# Altium PCB Ciruit_Analyzer.PcbDoc
Units mm, origin at the board's own origin, x right, y up, seen from the top; angles counter-clockwise.
Board outline 50.93 x 49.66 mm, 2 copper layers (Top Layer, Bottom Layer); 10 components, 6 nets, 28 pads, 0 vias.
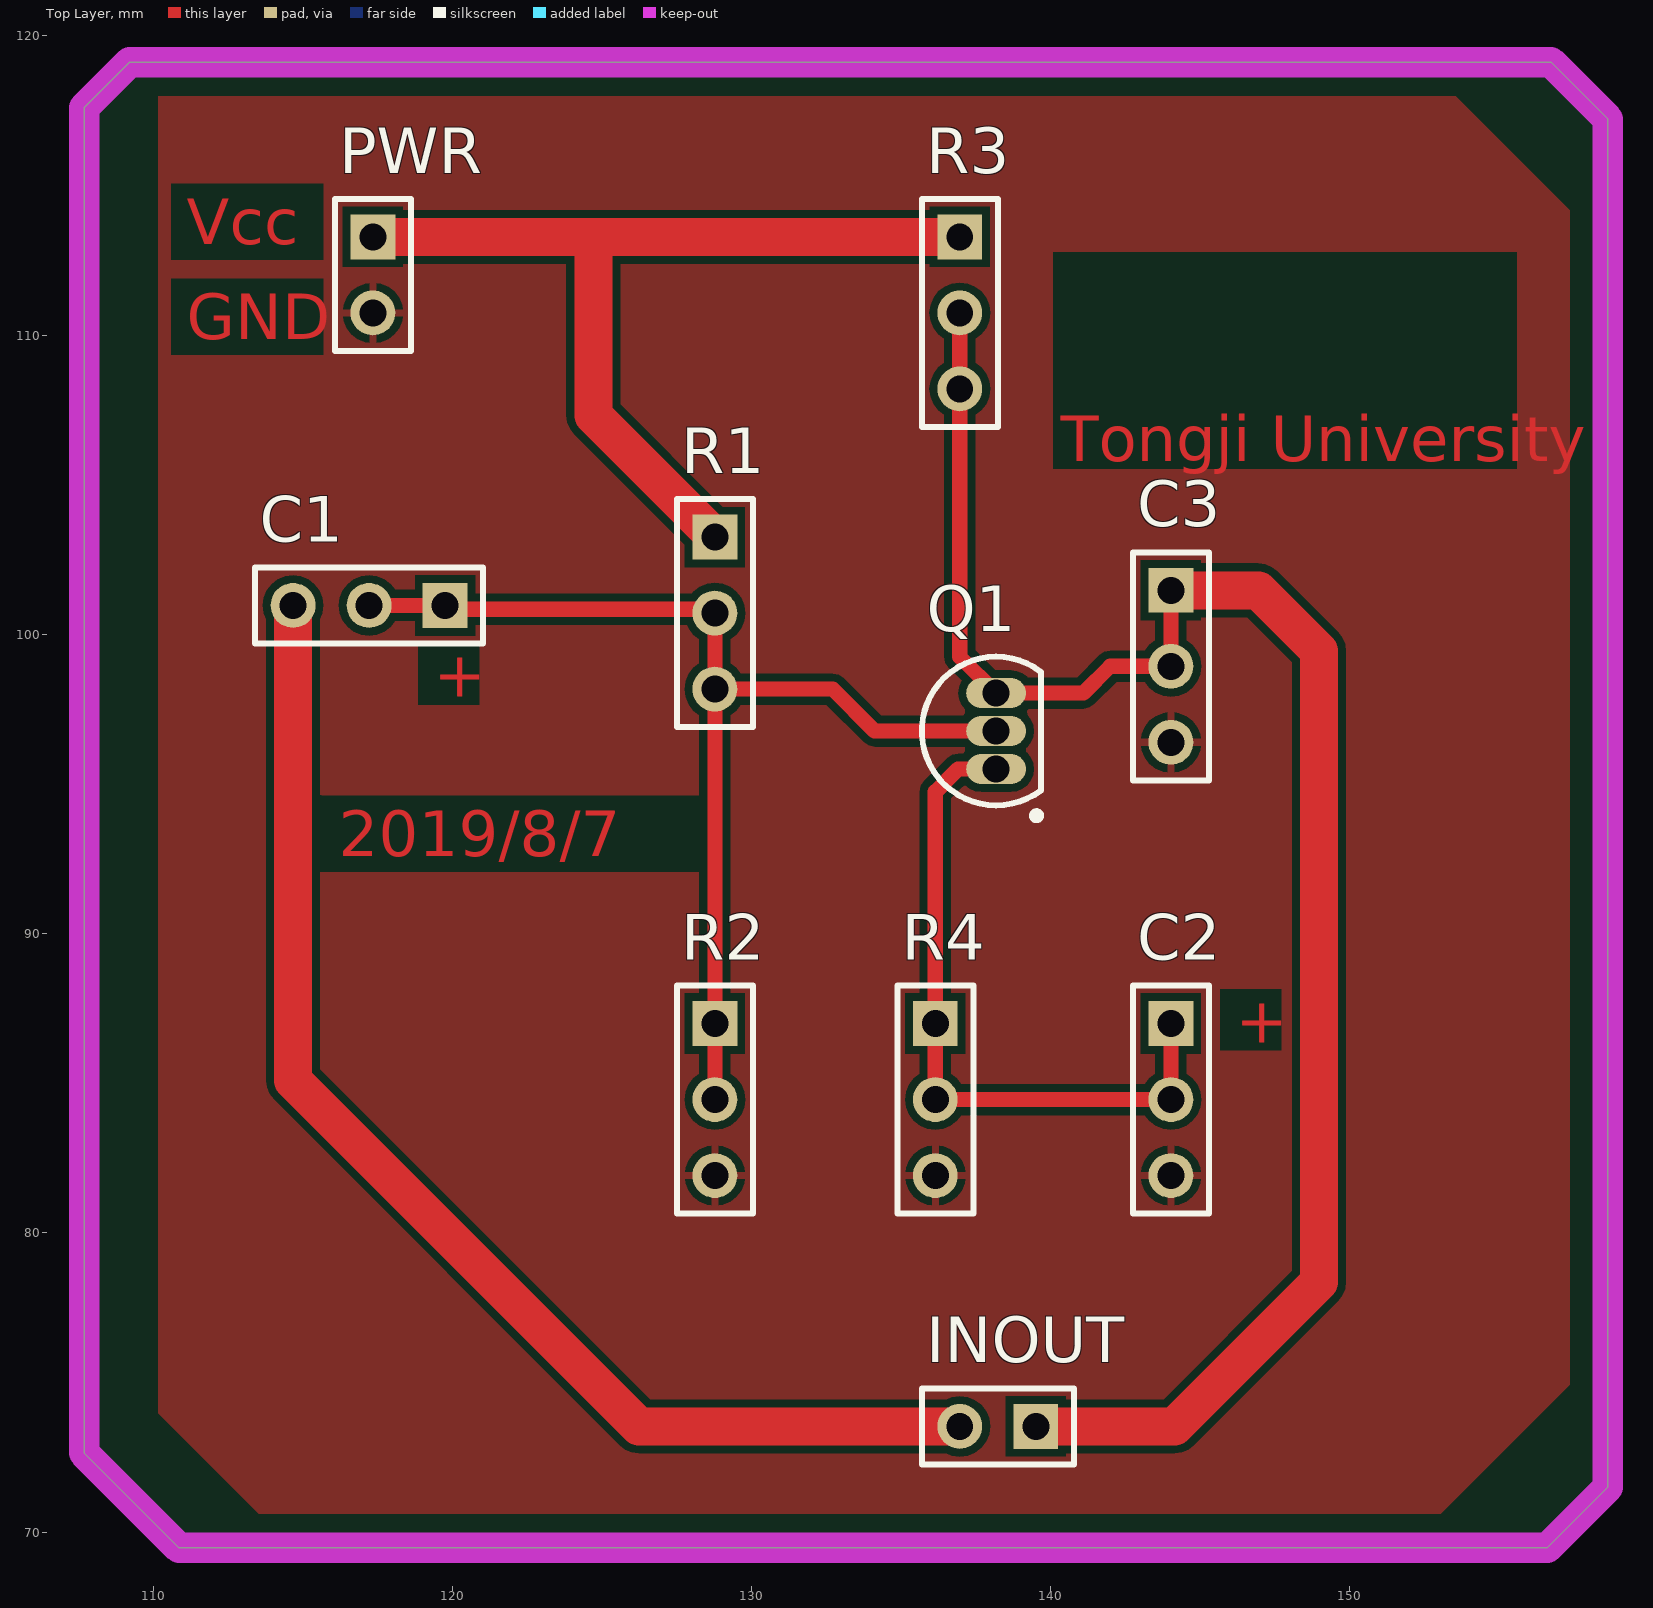
[diagram p0: Top Layer view]
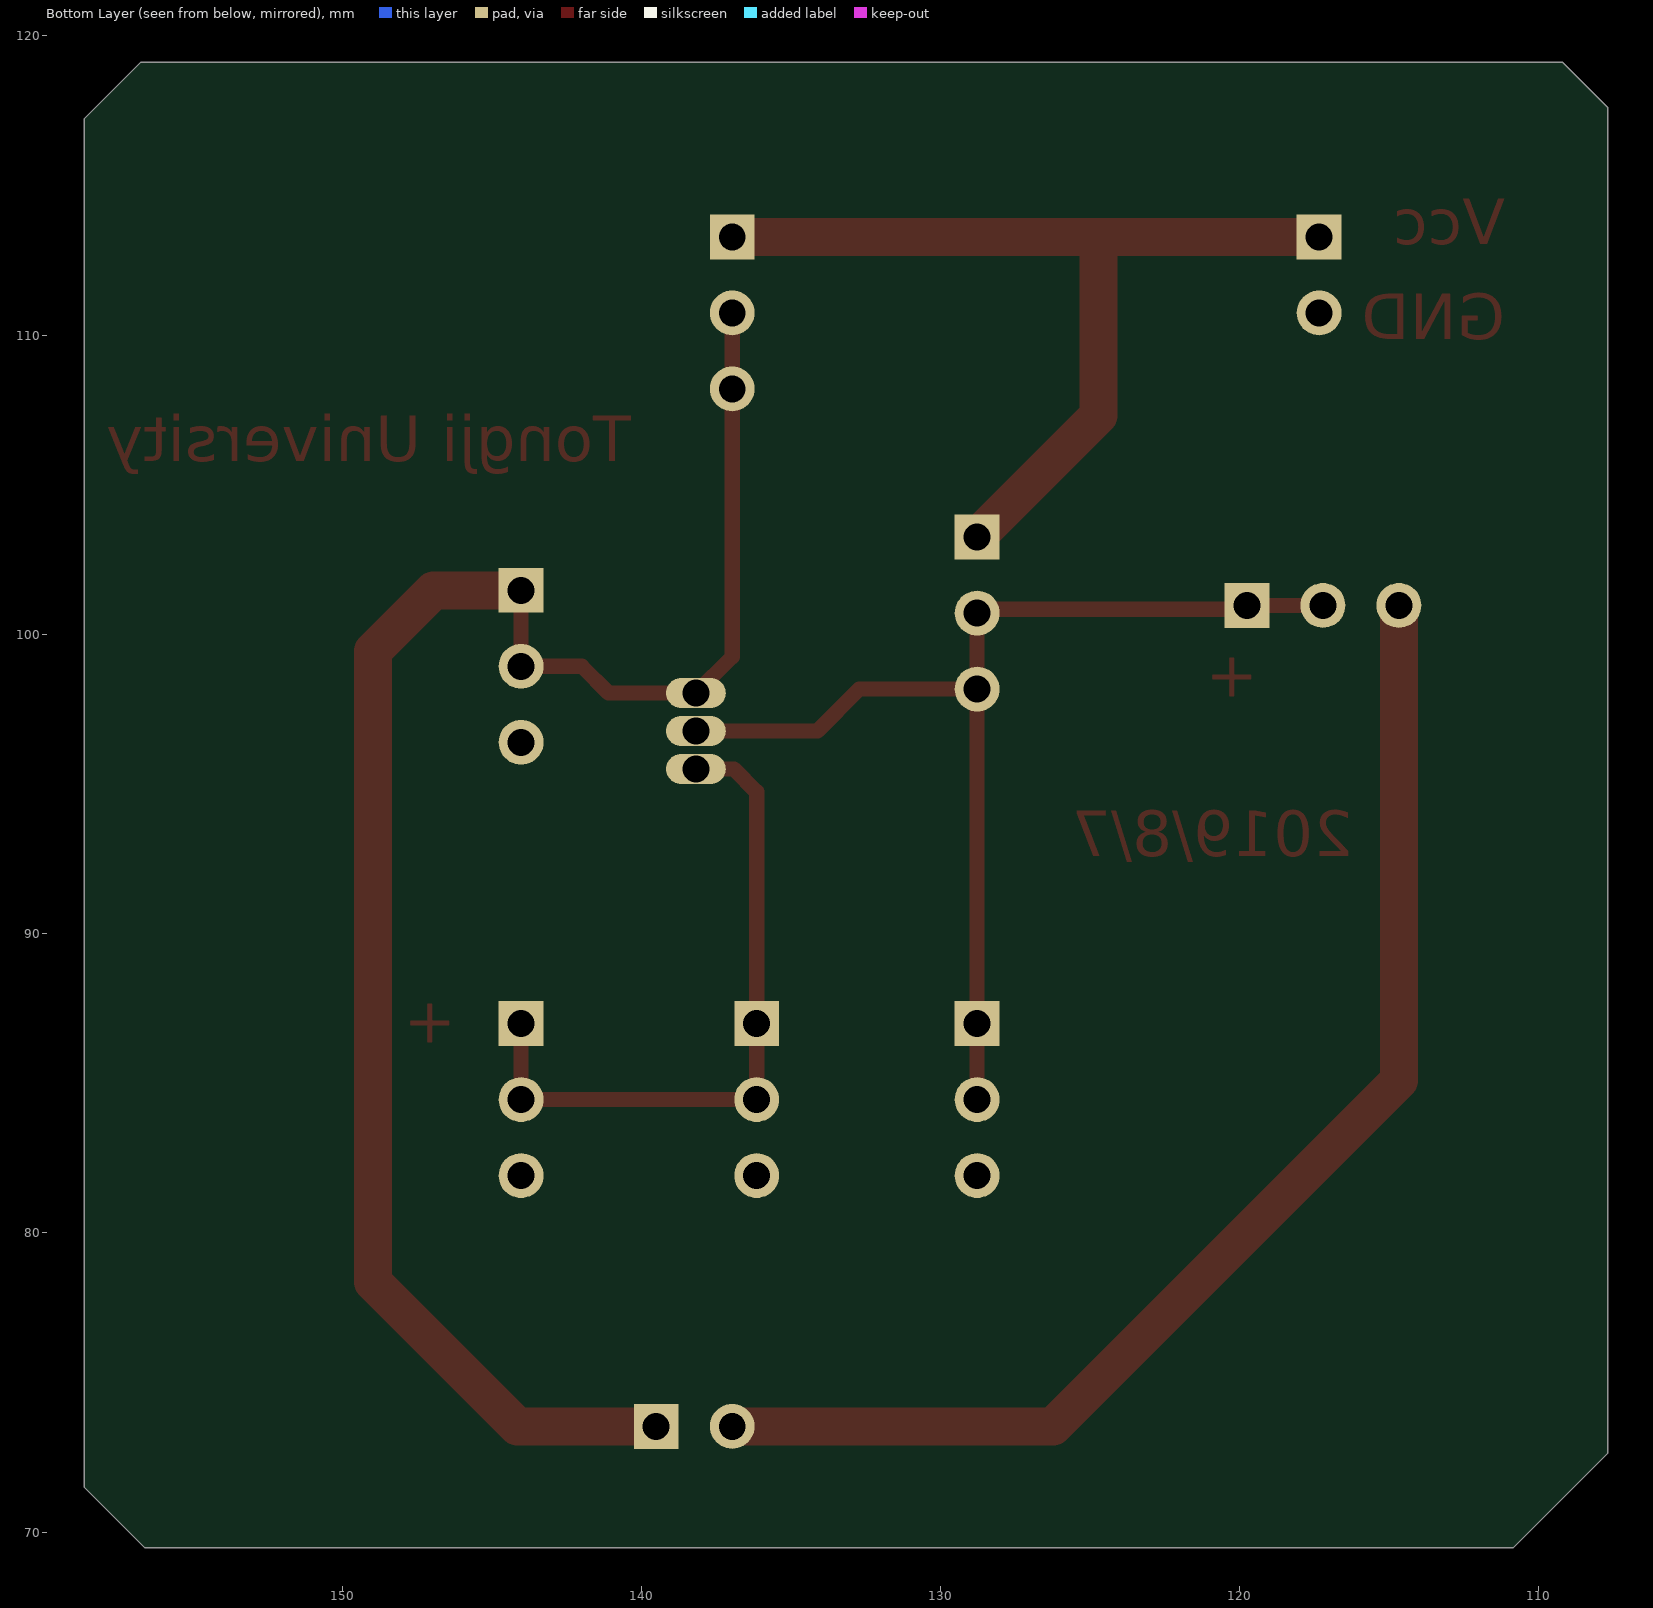
[diagram p1: Bottom Layer view, seen from below]

## Layer stack, top to bottom
Top Solder: solder mask 0.0102, Solder Resist, Dk 3.5
Top Layer: signal copper 0.0356
Dielectric 1: dielectric 0.32, FR-4, Dk 4.8
Bottom Layer: signal copper 0.0356
Bottom Solder: solder mask 0.0102, Solder Resist, Dk 3.5

## Board outline
107.696,72.644 107.696,117.602 109.22,119.126 156.718,119.126 158.623,117.221 158.623,71.501 156.591,69.469 110.871,69.469

## Design rules (kind name [scope] priority, off if disabled: settings)
Clearance [All] p1: gap=0.254 ignorepadtopadclearanceinfootprint=FALSE except(0: Arc-Hole Track-Hole SMDPad-Hole THPad-Hole Via-Hole Fill-Hole Poly-Hole Region-Hole Text-Hole)
PolygonConnect [All] p1: connectstyle=Relief reliefconductorwidth=0.254 reliefentries=4 polygonreliefangle="90 Angle" airgapwidth=0.254
RoutingVias [All] p1: holewidth=0.711 width=1.27 viastyle="Through Hole" minholewidth=0.711 minwidth=1.27 maxholewidth=0.711 maxwidth=1.27
SolderMaskExpansion [All] p1: expansion=0.102
Width [All] p1: maxlimit=1.27 minlimit=0.254 preferedwidth=0.508 minimp=50.000000 maximp=50.000000 favimp=50.000000
30 further rules are at their usual default settings.

## Components (designator, comment, footprint, x,y, rotation, side; value= is the part's Value field where it differs from the comment)
C1 "10u" HDR1X3 119.761,100.965 r180 top
C2 "47uf" HDR1X3 144.018,86.995 r270 top
C3 "470pf" HDR1X3 144.018,101.473 r270 top
INOUT "" HDR1X2 139.502,73.533 r180 top
PWR "" HDR1X2 117.348,113.284 r270 top
Q1 "9013" TO-92A 138.176,96.769 r0 top
R1 "R1 43K" HDR1X3 128.778,103.251 r270 top
R2 "R2 15K" HDR1X3 128.778,86.995 r270 top
R3 "R3 2K" HDR1X3 136.962,113.284 r270 top
R4 "R4 1K" HDR1X3 136.144,86.995 r270 top

## Footprints (in the part's own frame and the unit in brackets; to place one, negate y for a bottom-side part, rotate by r counter-clockwise, add the part's x,y. Pads: shape width x height; smd on the part's side, far side on the other; paste and mask are expansions set on the pad)
HDR1X2 [mm] "Connector; Header; 2 Position"
  rect 1.5x1.5 hole 0.9: 1(0,0)
  round 1.5 hole 0.9: 2(2.54,0)
  silkscreen extent -1.27,-1.27 3.81,1.27
HDR1X3 [mm] "Connector; Header; 3 Position"
  rect 1.5x1.5 hole 0.9: 1(0,0)
  round 1.5 hole 0.9: 2(2.54,0) 3(5.08,0)
  silkscreen extent -1.27,-1.27 6.35,1.27
TO-92A [mm] "TO, Flat Index; 3 In-Line, Axial Leads; Body Dia. 4.5mm; Leads 0.51 x 0.48 mm (max)"
  oval 2x1 hole 0.9: 1(0,-1.27) 2(0,0) 3(0,1.27)
  silkscreen extent -2.48,-2.95 1.5,2.48, body extent -2.48,-2.5 1.5,2.5, height 6.86

## Part data
C1 C2 C3 R1 R2 R3 R4: library part "Header 3", "Header, 3-Pin", LatestRevisionDate=17-Jul-2002, LatestRevisionNote="Re-released for DXP Platform.", Publisher="Altium Limited"
INOUT PWR: library part "Header 2", "Header, 2-Pin", LatestRevisionDate=17-Jul-2002, LatestRevisionNote="Re-released for DXP Platform.", Publisher="Altium Limited"
Q1: library part 2N3904, "NPN General Purpose Amplifier", ComponentLink1Description="Manufacturer Link", ComponentLink1URL=http://www.fairchildsemi.com/, ComponentLink2Description=Datasheet, ComponentLink2URL=http://www.fairchildsemi.com/ds/2N%2F2N3904.pdf, DatasheetVersion=1997, LatestRevisionDate=15-Jan-2003, LatestRevisionNote="PCB Footprint 'BCY-W3/D4.7' replaced", PackageDescription="TO, Flat Index; 3 In-Line, Axial Leads; Body Dia. 4.5mm; Leads 0.51 x 0.48 mm (max)", PackageReference=TO-92A, PackageVersion=Sep-1998, Published=8-Jun-2000, Publisher="Altium Limited"

## Nets (pads, with @x,y where several pads share a name; then routed paths per layer and width w, separated by ;. In a path a pad name is that pad's centre, name@x,y a point inside that pad or via, vN(x,y) a via of type N, cw(c..) or ccw(c..) an arc to the next point about the centre after c; other vN are vias at no path point)
DC+12V: PWR.1 R1.1 R3.1 | length 31.3
  Top Layer w1.27: PWR.1 124.714,113.284 ; R1.1 124.714,107.315 124.714,113.284 ; R3.1 124.714,113.284
GND: C2.3 C3.3 PWR.2 R2.3 R4.3
NetC1_1: C1.1 C1.2 Q1.2 R1.2 R1.3 R2.1 R2.2 | length 37.9
  Top Layer w0.508: C1.2 C1.1 119.888,100.838 128.651,100.838 R1.2 R1.3 ; R2.2 R2.1 R1.3 ; Q1.2 134.117,96.769 132.715,98.171 R1.3
NetC2_1: C2.1 C2.2 Q1.1 R4.1 R4.2 | length 23
  Top Layer w0.508: Q1.1 136.906,95.499 136.144,94.737 R4.1 R4.2 C2.2 C2.1
Ui: C1.3 INOUT.2 | length 42.9
  Top Layer w1.27: C1.3 114.681,85.09 126.238,73.533 INOUT.2
Uo: C3.1 C3.2 INOUT.1 Q1.3 R3.2 R3.3 | length 60.3
  Top Layer w0.508: R3.2 R3.3 136.962,99.253 Q1.3 141.097,98.039 141.991,98.933 C3.2 C3.1
  Top Layer w1.27: INOUT.1 144.145,73.533 148.971,78.359 148.971,99.441 146.939,101.473 C3.1

## Polygon pours and split planes (outlines as drawn)
GND on Top Layer "GND_L01_P002" (solid, remove dead copper, pour order 2): 110.172,117.983 153.543,117.983 157.353,114.173 157.353,74.93 153.035,70.612 113.538,70.612 110.172,73.977

## Keep-outs
Top Layer:
  the board outline again, w1.016

## Other copper
Top Layer:
  text "Vcc" at 111.125,113.03 h1.52
  text "GND" at 111.125,109.855 h1.52
  text "Tongji University" at 140.335,105.791 h1.52
  text "+" at 119.38,97.909 h1.52
  text "2019/8/7" at 116.205,92.583 h1.52
  text "+" at 146.177,86.36 h1.52